# EAGLE board tinyRF (EAGLE 6.4)
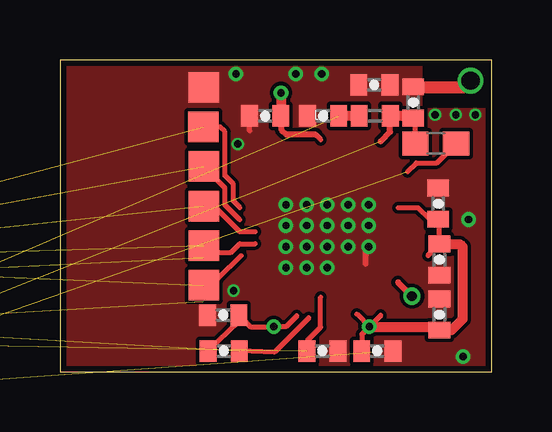
[diagram p0: board, top side]
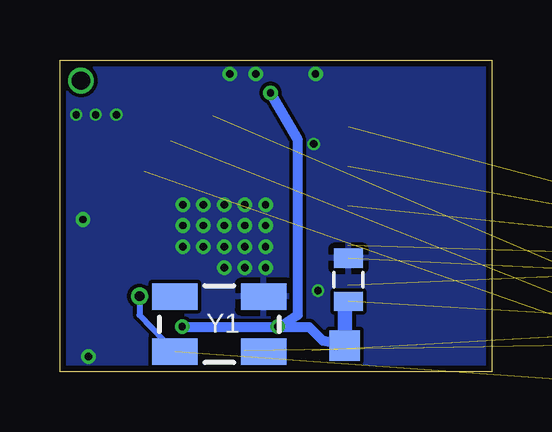
[diagram p1: board, bottom side, seen from below]

Size 18 x 13 mm. Coordinates in mm from the lower left corner, seen from the top.
Outline: 0,13 0,0 18,0 18,13 0,13
Copper layers (1*16): Top 0.035mm / dielectric 1.5mm / Bottom 0.035mm
Design rules "Fusion_eagle_rule_v1.1-JCM-restring *": minimum track width 6mil, minimum drill 12mil, track to track 6mil, track to pad 6mil, pad to pad 6mil, via to via 6mil, smd to smd 0mil, copper to edge 10mil, drill to drill 10mil, minimum pad ring 10mil, minimum via ring 2mil, stop-mask expansion 2mil, vias tented up to drill 100mil, thermal gap 10mil
tRestrict: area 15.1,11 to 18.1,13.5

## Footprints (pad centres in the part's own frame; a part is rotated, then mirrored left to right if it is on the bottom)
SOLDER_PAD_.05X.05 = smd 1.27 x 1.27: P$1 0,0
0402-CAP = smd 0.7 x 0.9: 1 -0.65,0; 2 0.65,0
0805 = smd 0.8 x 1.2: 1 -0.9,0; 2 0.9,0
0603 = smd 1.1 x 1: 1 -0.85,0; 2 0.85,0
C0402 = smd 0.7 x 0.9: 1 -0.65,0; 2 0.65,0
QFN40 = smd 0.28 x 0.85: 1 -2.25,-2.975; 2 -1.75,-2.975; 3 -1.25,-2.975; 4 -0.75,-2.975; 5 -0.25,-2.975; 6 0.25,-2.975; 7 0.75,-2.975; 8 1.25,-2.975; 9 1.75,-2.975; 10 2.25,-2.975; 21 2.25,2.975; 22 1.75,2.975; 23 1.25,2.975; 24 0.75,2.975; 25 0.25,2.975; 26 -0.25,2.975; 27 -0.75,2.975; 28 -1.25,2.975; 29 -1.75,2.975; 30 -2.25,2.975 | smd 0.85 x 0.28: 11 2.975,-2.25; 12 2.975,-1.75; 13 2.975,-1.25; 14 2.975,-0.75; 15 2.975,-0.25; 16 2.975,0.25; 17 2.975,0.75; 18 2.975,1.25; 19 2.975,1.75; 20 2.975,2.25; 31 -2.975,2.25; 32 -2.975,1.75; 33 -2.975,1.25; 34 -2.975,0.75; 35 -2.975,0.25; 36 -2.975,-0.25; 37 -2.975,-0.75; 38 -2.975,-1.25; 39 -2.975,-1.75; 40 -2.975,-2.25 | smd 4.5 x 4.5: GND 0,0
CRYSTAL-SMD-5X3 = smd 1.9 x 1.1: 1 -1.85,-1.15; 2 1.85,-1.15; 3 1.85,1.15; 4 -1.85,1.15

## Placement (x,y rotation side)
_SS  SOLDER_PAD.05X.05  [SOLDER_PAD_.05X.05]  5.97,10.21 0 top
C1  15pF  [0402-CAP]  14.73,11.22 90 top
C3  2.0pF  [0402-CAP]  10.97,10.66 180 top
C4  1.5pF  [0402-CAP]  13.11,11.96 180 top
C5  0.47uF  [0402-CAP]  10.95,0.86 0 top
C6  0.047uF  [0402-CAP]  8.56,10.66 180 top
C7  0.047uF  [0402-CAP]  15.82,2.38 90 top
C8  0.047uF  [0402-CAP]  6.81,2.36 180 top
C9  0.047uF  [0402-CAP]  13.23,0.86 0 top
C10  0.047uF  [0402-CAP]  15.82,4.67 270 top
C11  0.047uF  [0402-CAP]  15.77,7.01 90 top
C14  2.2uF  [0805]  5.97,3.83 90 bottom
C15  0.47uF  [0402-CAP]  6.83,0.86 0 top
GND  SOLDER_PAD.05X.05  [SOLDER_PAD_.05X.05]  5.99,11.86 0 top
IRQ  SOLDER_PAD.05X.05  [SOLDER_PAD_.05X.05]  5.99,6.9 0 top
L1  [0603]  15.67,9.52 180 top
L2  [C0402]  13.13,10.66 0 top
MISO  SOLDER_PAD.05X.05  [SOLDER_PAD_.05X.05]  5.99,3.6 0 top
MOSI  SOLDER_PAD.05X.05  [SOLDER_PAD_.05X.05]  5.99,5.25 0 top
SCK  SOLDER_PAD.05X.05  [SOLDER_PAD_.05X.05]  5.99,8.56 0 top
U$1  CYRF69103  [QFN40]  -15.38,1.6 0 top  (outside the outline)
VCC  SOLDER_PAD.05X.05  [SOLDER_PAD_.05X.05]  6.12,1.09 0 bottom
Y1  [CRYSTAL-SMD-5X3]  11.35,1.98 180 bottom

## Library data of the parts
_SS GND IRQ MISO MOSI SCK U$1 VCC = JCM
C1 = SparkFun-Passives; PARTNO: C0402C150J5GACTU; VOLT: 50
C3 = SparkFun-Passives; PARTNO: C0402C209C5GACTU; VOLT: 50
C4 = SparkFun-Passives; PARTNO: C0402C159B5GACTU; VOLT: 50
C5 C15 = SparkFun-Passives; PARTNO: GRM155R60J474KE19D; VOLT: 6.3
C6-C11 = SparkFun-Passives; PARTNO: 0402YD473KAT2A
C14 = SparkFun-Passives; PARTNO: GRM21BR71A225KA01L
L1 = SparkFun-Passives; PARTNO: ELJ-RE22NGFA
L2 = SparkFun-Passives; PARTNO: ELJ-RF1N8DFB
Y1 = SparkFun-FreqCtrl; PARTNO: 7B-12.000MEEQ-T

## Nets
_SS: _SS.P$1 U$1.25
GND: C1.2 C3.2 C4.1 C4.2 C5.2 C6.2 C7.2 C8.2 C9.2 C10.2 C11.2 C14.2 GND.P$1 U$1.12 U$1.14 U$1.17 U$1.18 U$1.20 U$1.37 U$1.GND Y1.1
IRQ: IRQ.P$1 U$1.27
MISO: MISO.P$1 U$1.29
MOSI: MOSI.P$1 U$1.28
N$2: U$1.2 Y1.3
N$4: U$1.21
N$5: U$1.22
RFBIAS: L1.1 U$1.10
RFN: C3.1 L2.1 U$1.13
RFP: C1.1 L1.2 L2.2 U$1.11
RST: C15.2 U$1.34
SCK: SCK.P$1 U$1.26
VCC: C6.1 C7.1 C8.1 C9.1 C10.1 C11.1 C14.1 C15.1 U$1.3 U$1.6 U$1.7 U$1.9 U$1.16 U$1.33 U$1.39 U$1.40 VCC.P$1
VDD: C5.1 U$1.36

## Tracks (layer width: path | path; a pad name or v marks a point on that pad's centre or on a via)
_SS  (1 unrouted)
  Top 0.203: 7.51,6.84 7.24,7.11 7.24,7.82 6.88,8.17 6.88,10 6.68,10.21 _SS.P$1
GND  (via drill 0.3 pad 0.51, 0.3 pad 0.61)  (7 unrouted)
  Top 0.203: 7.91,10.03 C6.2
  Top 0.254: 12.75,4.49 12.75,5.28
  Top 0.508: C1.2 16.86,11.87 17.12,12.14
  other vias: 12.88,6.95 12.01,6.95 11.15,6.95 10.29,6.95 9.42,6.95 12.88,6.09 12.01,6.09 11.15,6.09 10.29,6.09 9.42,6.09 12.88,5.2 12.01,5.2 11.15,5.2 10.29,5.2 9.42,5.2 11.15,4.34 10.29,4.34 9.42,4.34 7.34,12.42 7.42,9.49 10.92,12.42 16.82,0.63 9.83,12.42 17.04,6.35 7.24,3.37 15.65,10.71 17.32,10.71 16.51,10.71
  pour Bottom: -0.83,-0.45 18.17,-0.45 18.17,13.55 -0.83,13.55
  pour Top (rank 2, no thermals): -0.83,-0.45 18.17,-0.45 18.17,13.55 -0.83,13.55
IRQ  (1 unrouted)
  Top 0.203: 8.15,5.84 7.49,5.84 6.43,6.9 IRQ.P$1
MISO  (1 unrouted)
  Top 0.203: 7.56,4.84 6.58,3.86 6.25,3.86 MISO.P$1
MOSI  (1 unrouted)
  Top 0.203: MOSI.P$1 6.2,5.25 6.48,4.97 7.14,4.97 7.49,5.33 8.14,5.33
N$1  (via drill 0.76 pad 1.07)
  other vias: 17.12,12.14
N$2  (via drill 0.41 pad 0.71)  (1 unrouted)
  Top 0.254: 14.1,3.73 v14.68,3.15
  Bottom 0.254: v14.68,3.15 14.68,2.36 Y1.3
RFBIAS  (1 unrouted)
  Top 0.203: 14.49,8.34 14.86,8.71 15.71,8.71 L1.1
RFN  (1 unrouted)
  Top 0.152: 12.38,10.56 L2.1
  Top 0.406: L2.1 C3.1
RFP  (1 unrouted)
  Top 0.152: 13.77,10.65 L2.2
  Top 0.203: 14.82,10.66 C1.1 14.82,10.48 L1.2
  Top 0.254: 13.38,9.61 13.77,10 13.77,10.65
  Top 0.406: 14.82,10.66 L2.2
RST  (1 unrouted)
  Top 0.203: 10.38,2.24 8.94,0.81 C15.2
SCK  (1 unrouted)
  Top 0.203: 7.5,6.34 6.88,6.96 6.88,7.67 SCK.P$1
VCC  (via drill 0.3 pad 0.61)  (8 unrouted)
  Top 0.152: 9.04,10.89 C6.1 9.25,10.63
  Top 0.203: 10.88,9.67 10.67,9.88 | 14.11,6.83 14.94,6.83 15.41,6.36 C11.1 15.82,6.31 C10.1 15.35,4.84 | 9.22,10.67 C6.1 | 12.38,2.4 v12.9,1.88 | 13.38,2.35 v12.9,1.88 | v12.9,1.88 12.58,1.56 C9.1 | 9.88,2.33 9.42,1.88 v8.92,1.88 7.94,1.88 C8.1 7.46,2.08 C15.1
  Top 0.254: 10.67,9.88 9.45,9.88 9.25,10.08 9.25,10.63
  Top 0.406: v9.22,11.63 9.22,10.67 | C10.1 16.67,5.32 16.79,5.2 16.79,2.18 16.34,1.73 C7.1 15.68,1.88 v12.9,1.88
  Bottom 0.254: 8.89,1.85 v8.92,1.88
  Bottom 0.406: v12.9,1.88 v8.92,1.88 8.81,1.88 8.08,2.36 8.08,9.67 v9.22,11.63 | VCC.P$1 7.04,1.29 7.59,1.85 8.89,1.85
  Bottom 0.61: C14.1 6.12,2.93 VCC.P$1
VDD  (1 unrouted)
  Top 0.203: C5.1 10.32,1.3 10.87,1.85 10.87,3.11

## Text on the board
bDocu: CYRF6936-BoB / v0.1 / 18 Apr 2013